# EAGLE board shinobi (EAGLE 9.6.2)
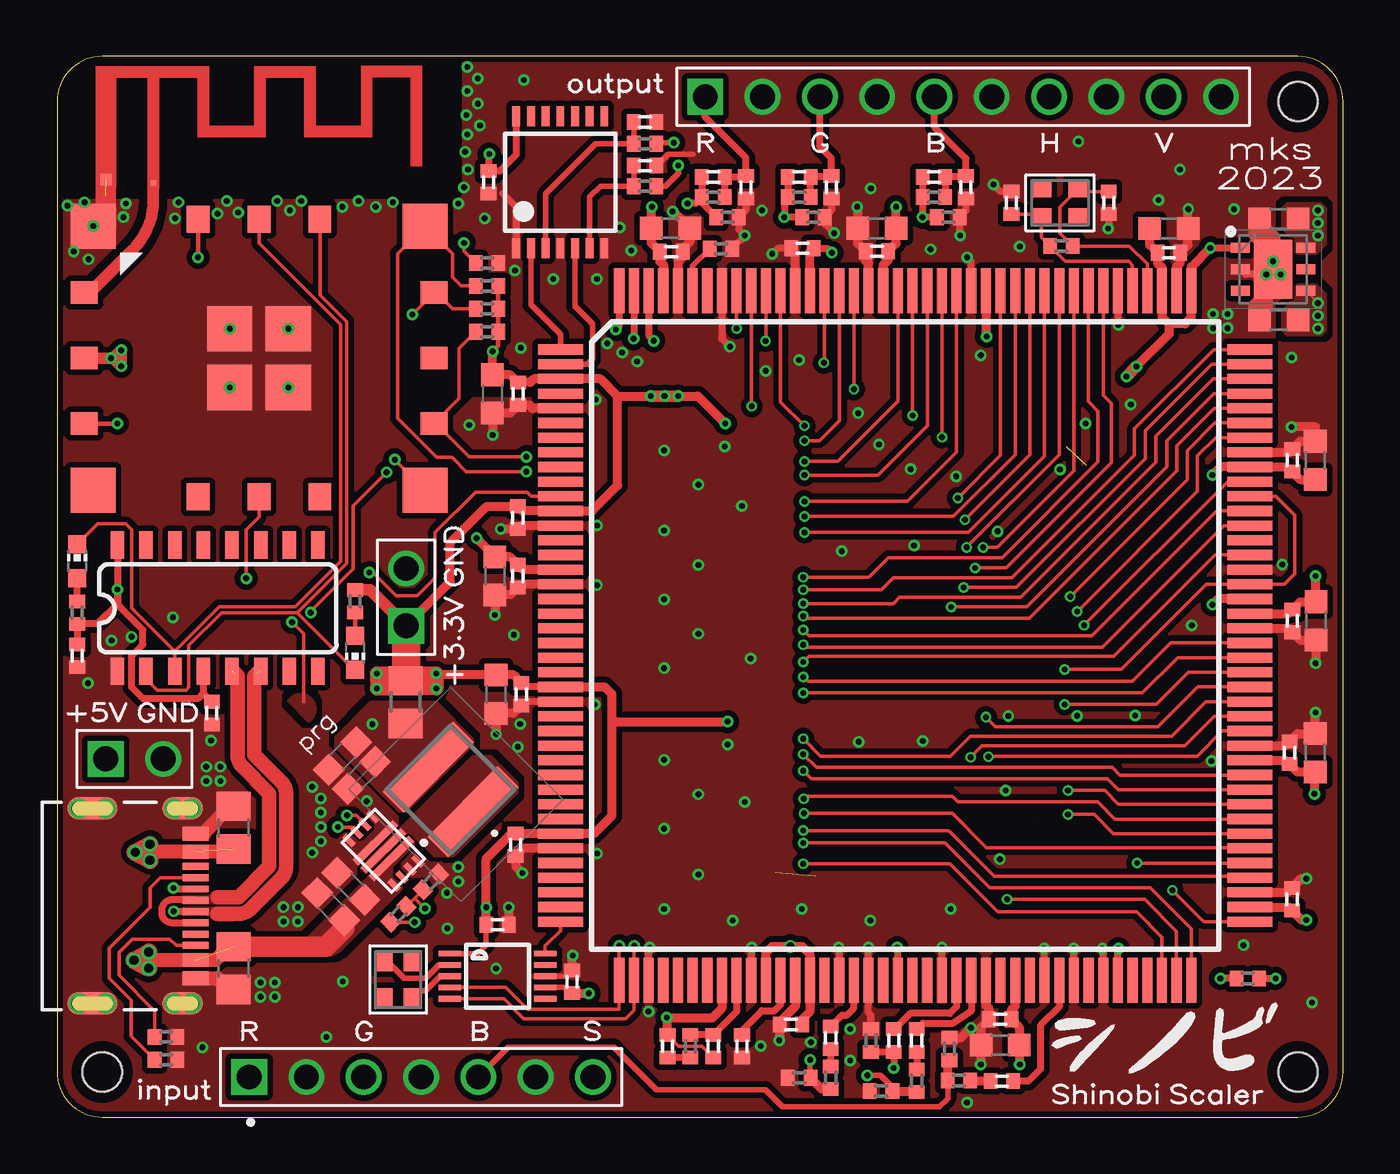
[diagram p0: board, top side]
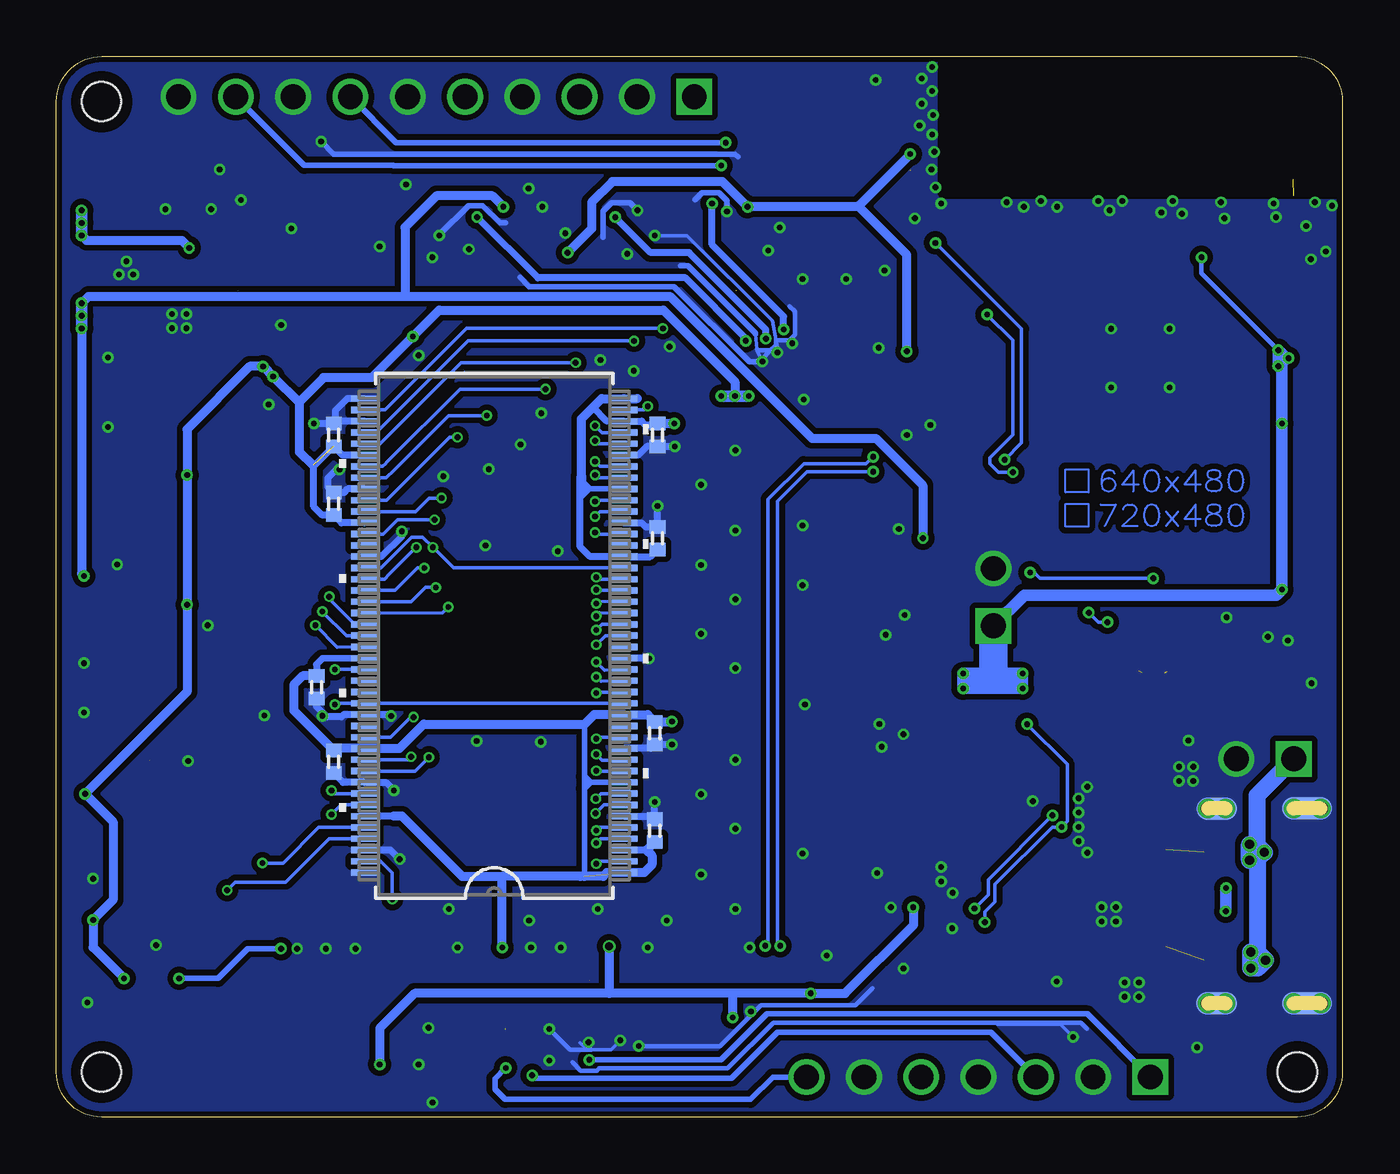
[diagram p1: board, bottom side, seen from below]

Size 57 x 47 mm. Coordinates in mm from the lower left corner, seen from the top.
Outline: 0,45 0,2 arc90 2,0 55,0 arc90 57,2 57,45 arc90 55,47 2,47 arc90 0,45
Copper layers (1*16): Top 0.035mm / dielectric 0.9mm / Bottom 0.035mm
Design rules "default *": minimum track width 3.5mil, minimum drill 10mil, track to track 3.5mil, track to pad 3.5mil, pad to pad 3.5mil, via to via 3.5mil, smd to smd 3.5mil, copper to edge 6mil, drill to drill 6mil, minimum pad ring 4mil, minimum via ring 4mil, stop-mask expansion 0mil, vias tented up to drill 50mil, thermal gap 10mil
Net classes: 1 power: width 0.305 mm
Holes 1.75 mm at 2,2 55,2 55,45
tRestrict: area 0,40.9 to 17.7,47; area 0.9,0.9 to 3.1,3.1; area 53.9,0.9 to 56.1,3.1; area 53.9,43.9 to 56.1,46.1; 4 lines
bRestrict: area 0.9,0.9 to 3.1,3.1; area 53.9,0.9 to 56.1,3.1; area 53.9,43.9 to 56.1,46.1; area 0,40.9 to 17.7,47

## Footprints (pad centres in the part's own frame; a part is rotated, then mirrored left to right if it is on the bottom)
ANTENNA = smd 0.5 x 0.5: P$1 -7.017,-1.082 | smd 0.25 x 0.25: P$2 -4.917,-1.232
C0402 = smd 0.6 x 0.7: 1 -0.5,0; 2 0.5,0
C0603 = smd 1 x 1: 1 -0.85,0; 2 0.85,0
C0805 = smd 1.3 x 1.5: 1 -0.95,0; 2 0.95,0
R0402 = smd 0.6 x 0.7: 1 -0.5,0; 2 0.5,0
2171790001_MOL = smd 0.991 x 1.803 bottom: 1 -4.316,2.728; 2 4.32,2.733 | smd 0.991 x 2.21 bottom: 3 4.316,-1.272; 4 -4.32,-1.272 | smd 0.991 x 2.21: 13 -4.32,-1.272; 14 4.32,-1.272 | smd 0.991 x 1.803: 15 -4.32,2.728; 16 4.32,2.728 | smd 0.61 x 1.143: A1/B12 -3.2,3.303; A4/B9 -2.4,3.303; B1/A12 3.2,3.303; B4/A9 2.4,3.303 | smd 0.305 x 1.143: A5 -1.25,3.303; A6 -0.25,3.303; A7 0.25,3.303; A8 1.25,3.303; B5 1.75,3.303; B6 0.75,3.303; B7 -0.75,3.303; B8 -1.75,3.303 | drill 0.61 pad 0.61: S_1_H1 -4.318,-0.686; S_1_H2 -4.318,-1.88; S_2_H1 4.318,-0.686; S_2_H2 4.318,-1.88; S_3_H1 -4.318,3.124; S_3_H2 -4.318,2.337; S_4_H1 4.318,3.124; S_4_H2 4.318,2.337
61300711121 = drill 1.1 square: 1 -7.62,0 | drill 1.1: 2 -5.08,0; 3 -2.54,0; 4 0,0; 5 2.54,0; 6 5.08,0; 7 7.62,0
61301011121 = drill 1.1 square: 1 -11.43,0 | drill 1.1: 2 -8.89,0; 3 -6.35,0; 4 -3.81,0; 5 -1.27,0; 6 1.27,0; 7 3.81,0; 8 6.35,0; 9 8.89,0; 10 11.43,0
61300211121 = drill 1.1 square: 1 -1.27,0 | drill 1.1: 2 1.27,0
VLS4012 = smd 1.3 x 4.4: 1 -1.4,0; 2 1.4,0
CHIP-LED0603 = smd 0.8 x 0.8: A 0,-0.75; C 0,0.75
R0805 = smd 1.3 x 1.5: 1 -0.95,0; 2 0.95,0
PQFP160 = smd 2 x 0.45: 1 -15.275,12.675; 2 -15.275,12.025; 3 -15.275,11.375; 4 -15.275,10.725; 5 -15.275,10.075; 6 -15.275,9.425; 7 -15.275,8.775; 8 -15.275,8.125; 9 -15.275,7.475; 10 -15.275,6.825; 11 -15.275,6.175; 12 -15.275,5.525; 13 -15.275,4.875; 14 -15.275,4.225; 15 -15.275,3.575; 16 -15.275,2.925; 17 -15.275,2.275; 18 -15.275,1.625; 19 -15.275,0.975; 20 -15.275,0.325; 21 -15.275,-0.325; 22 -15.275,-0.975; 23 -15.275,-1.625; 24 -15.275,-2.275; 25 -15.275,-2.925; 26 -15.275,-3.575; 27 -15.275,-4.225; 28 -15.275,-4.875; 29 -15.275,-5.525; 30 -15.275,-6.175; 31 -15.275,-6.825; 32 -15.275,-7.475; 33 -15.275,-8.125; 34 -15.275,-8.775; 35 -15.275,-9.425; 36 -15.275,-10.075; 37 -15.275,-10.725; 38 -15.275,-11.375; 39 -15.275,-12.025; 40 -15.275,-12.675; 81 15.275,-12.675; 82 15.275,-12.025; 83 15.275,-11.375; 84 15.275,-10.725; 85 15.275,-10.075; 86 15.275,-9.425; 87 15.275,-8.775; 88 15.275,-8.125; 89 15.275,-7.475; 90 15.275,-6.825; 91 15.275,-6.175; 92 15.275,-5.525; 93 15.275,-4.875; 94 15.275,-4.225; 95 15.275,-3.575; 96 15.275,-2.925; 97 15.275,-2.275; 98 15.275,-1.625; 99 15.275,-0.975; 100 15.275,-0.325; 101 15.275,0.325; 102 15.275,0.975; 103 15.275,1.625; 104 15.275,2.275; 105 15.275,2.925; 106 15.275,3.575; 107 15.275,4.225; 108 15.275,4.875; 109 15.275,5.525; 110 15.275,6.175; 111 15.275,6.825; 112 15.275,7.475; 113 15.275,8.125; 114 15.275,8.775; 115 15.275,9.425; 116 15.275,10.075; 117 15.275,10.725; 118 15.275,11.375; 119 15.275,12.025; 120 15.275,12.675 | smd 0.45 x 2: 41 -12.675,-15.275; 42 -12.025,-15.275; 43 -11.375,-15.275; 44 -10.725,-15.275; 45 -10.075,-15.275; 46 -9.425,-15.275; 47 -8.775,-15.275; 48 -8.125,-15.275; 49 -7.475,-15.275; 50 -6.825,-15.275; 51 -6.175,-15.275; 52 -5.525,-15.275; 53 -4.875,-15.275; 54 -4.225,-15.275; 55 -3.575,-15.275; 56 -2.925,-15.275; 57 -2.275,-15.275; 58 -1.625,-15.275; 59 -0.975,-15.275; 60 -0.325,-15.275; 61 0.325,-15.275; 62 0.975,-15.275; 63 1.625,-15.275; 64 2.275,-15.275; 65 2.925,-15.275; 66 3.575,-15.275; 67 4.225,-15.275; 68 4.875,-15.275; 69 5.525,-15.275; 70 6.175,-15.275; 71 6.825,-15.275; 72 7.475,-15.275; 73 8.125,-15.275; 74 8.775,-15.275; 75 9.425,-15.275; 76 10.075,-15.275; 77 10.725,-15.275; 78 11.375,-15.275; 79 12.025,-15.275; 80 12.675,-15.275; 121 12.675,15.275; 122 12.025,15.275; 123 11.375,15.275; 124 10.725,15.275; 125 10.075,15.275; 126 9.425,15.275; 127 8.775,15.275; 128 8.125,15.275; 129 7.475,15.275; 130 6.825,15.275; 131 6.175,15.275; 132 5.525,15.275; 133 4.875,15.275; 134 4.225,15.275; 135 3.575,15.275; 136 2.925,15.275; 137 2.275,15.275; 138 1.625,15.275; 139 0.975,15.275; 140 0.325,15.275; 141 -0.325,15.275; 142 -0.975,15.275; 143 -1.625,15.275; 144 -2.275,15.275; 145 -2.925,15.275; 146 -3.575,15.275; 147 -4.225,15.275; 148 -4.875,15.275; 149 -5.525,15.275; 150 -6.175,15.275; 151 -6.825,15.275; 152 -7.475,15.275; 153 -8.125,15.275; 154 -8.775,15.275; 155 -9.425,15.275; 156 -10.075,15.275; 157 -10.725,15.275; 158 -11.375,15.275; 159 -12.025,15.275; 160 -12.675,15.275
WIN_TSOP-86_WIN = smd 1.206 x 0.279: 1 -5.75,10.5; 2 -5.75,10; 3 -5.75,9.5; 4 -5.75,9; 5 -5.75,8.5; 6 -5.75,8; 7 -5.75,7.5; 8 -5.75,7; 9 -5.75,6.5; 10 -5.75,6; 11 -5.75,5.5; 12 -5.75,5; 13 -5.75,4.5; 14 -5.75,4; 15 -5.75,3.5; 16 -5.75,3; 17 -5.75,2.5; 18 -5.75,2; 19 -5.75,1.5; 20 -5.75,1; 21 -5.75,0.5; 22 -5.75,0; 23 -5.75,-0.5; 24 -5.75,-1; 25 -5.75,-1.5; 26 -5.75,-2; 27 -5.75,-2.5; 28 -5.75,-3; 29 -5.75,-3.5; 30 -5.75,-4; 31 -5.75,-4.5; 32 -5.75,-5; 33 -5.75,-5.5; 34 -5.75,-6; 35 -5.75,-6.5; 36 -5.75,-7; 37 -5.75,-7.5; 38 -5.75,-8; 39 -5.75,-8.5; 40 -5.75,-9; 41 -5.75,-9.5; 42 -5.75,-10; 43 -5.75,-10.5; 44 5.75,-10.5; 45 5.75,-10; 46 5.75,-9.5; 47 5.75,-9; 48 5.75,-8.5; 49 5.75,-8; 50 5.75,-7.5; 51 5.75,-7; 52 5.75,-6.5; 53 5.75,-6; 54 5.75,-5.5; 55 5.75,-5; 56 5.75,-4.5; 57 5.75,-4; 58 5.75,-3.5; 59 5.75,-3; 60 5.75,-2.5; 61 5.75,-2; 62 5.75,-1.5; 63 5.75,-1; 64 5.75,-0.5; 65 5.75,0; 66 5.75,0.5; 67 5.75,1; 68 5.75,1.5; 69 5.75,2; 70 5.75,2.5; 71 5.75,3; 72 5.75,3.5; 73 5.75,4; 74 5.75,4.5; 75 5.75,5; 76 5.75,5.5; 77 5.75,6; 78 5.75,6.5; 79 5.75,7; 80 5.75,7.5; 81 5.75,8; 82 5.75,8.5; 83 5.75,9; 84 5.75,9.5; 85 5.75,10; 86 5.75,10.5
ESP-06 = smd 2 x 2: P$1 -7.352,-5.866; P$5 -7.352,5.834; P$9 7.348,5.834; P$13 7.348,-5.866; P$17 -1.302,-1.316; P$18 1.298,-1.316; P$19 1.298,1.284; P$20 -1.302,1.284 | smd 1.2 x 1: P$2 -7.752,-2.916; P$3 -7.752,-0.016; P$4 -7.752,2.884; P$10 7.748,2.884; P$11 7.748,-0.016; P$12 7.748,-2.916 | smd 1 x 1.2: P$6 -2.702,6.134; P$7 -0.002,6.134; P$8 2.698,6.134; P$14 2.698,-6.166; P$15 -0.002,-6.166; P$16 -2.702,-6.166
TSSOP14 = smd 0.35 x 0.9: 1 -1.95,-2.925; 2 -1.3,-2.925; 3 -0.65,-2.925; 4 0,-2.925; 5 0.65,-2.925; 6 1.3,-2.925; 7 1.95,-2.925; 8 1.95,2.925; 9 1.3,2.925; 10 0.65,2.925; 11 0,2.925; 12 -0.65,2.925; 13 -1.3,2.925; 14 -1.95,2.925
MSOP10 = smd 0.25 x 1: 1 -1,-2.113; 2 -0.5,-2.113; 3 0,-2.113; 4 0.5,-2.113; 5 1,-2.113; 6 1,2.113; 7 0.5,2.113; 8 0,2.113; 9 -0.5,2.113; 10 -1,2.113
SO016 = smd 0.6 x 1.2: 1 -4.445,-2.8; 2 -3.175,-2.8; 3 -1.905,-2.8; 4 -0.635,-2.8; 5 0.635,-2.8; 6 1.905,-2.8; 7 3.175,-2.8; 8 4.445,-2.8; 9 4.445,2.8; 10 3.175,2.8; 11 1.905,2.8; 12 0.635,2.8; 13 -0.635,2.8; 14 -1.905,2.8; 15 -3.175,2.8; 16 -4.445,2.8
RGX0011A = smd 2.5 x 0.35: 1 0,0.5; 2 0,0; 3 0,-0.5 | smd 0.25 x 0.6: 4 -0.75,-1.4; 5 -0.25,-1.4; 6 0.25,-1.4; 7 0.75,-1.4; 8 0.75,1.4; 9 0.25,1.4; 10 -0.25,1.4; 11 -0.75,1.4
SON95P300X300X95-7N = smd 0.85 x 0.45: 1 -1.45,0.95; 2 -1.45,0; 3 -1.45,-0.95; 4 1.45,-0.95; 5 1.45,0; 6 1.45,0.95 | smd 1.7 x 2.6: 7 0,0
CRYSTAL_2.5X2 = smd 0.9 x 0.75: 1 -0.825,-0.625; 2 0.825,-0.625; 3 0.825,0.625; 4 -0.825,0.625

## Placement (x,y rotation side)
ANT1  WIFI_ANT_ESP8266LARGE_ANT  [ANTENNA]  9.19,42.63 0 top
C1  0.1uF  [C0402]  22.82,5.99 90 top
C2  0.1uF  [C0402]  19.52,8.53 0 top
C3  47nF  [C0402]  34.29,3.52 90 top
C4  47nF  [C0402]  38.1,3.4 90 top
C5  47nF  [C0402]  41.88,1.6 0 top
C6  1nF  [C0402]  37.08,3.4 270 top
C7  47nF  [C0402]  27.05,3.14 90 top
C8  47nF  [C0402]  29.08,3.14 270 top
C9  47nF  [C0402]  30.35,3.14 90 top
C10  15pF  [C0402]  42.29,40.51 270 top
C11  15pF  [C0402]  46.61,40.51 90 top
C12  0.1uF  [C0402]  0.89,20.45 270 top
C13  10nF  [C0402]  6.86,17.91 270 top
C14  0.1uF  [C0402]  20.42,23.98 270 top
C15  0.1uF  [C0402]  36.34,38.37 180 top
C16  0.1uF  [C0402]  54.75,21.99 270 top
C17  10uF  [C0603]  19.41,23.98 270 top
C18  10uF  [C0603]  36.34,39.39 180 top
C19  10uF  [C0603]  55.79,21.99 270 top
C20  0.1uF  [C0402]  20.32,12.07 270 top
C21  0.1uF  [C0402]  32.53,4.11 180 top
C22  0.1uF  [C0402]  41.8,4.33 180 top
C23  0.1uF  [C0402]  54.62,16.14 90 top
C24  0.1uF  [C0402]  54.75,29.1 90 top
C25  0.1uF  [C0402]  49.28,38.3 0 top
C26  0.1uF  [C0402]  20.57,18.75 270 top
C27  0.1uF  [C0402]  20.42,26.57 270 top
C28  0.1uF  [C0402]  20.44,32.05 270 top
C29  0.1uF  [C0402]  27.22,38.35 0 top
C30  0.1uF  [C0402]  33.03,38.5 180 top
C31  10uF  [C0603]  55.77,16.14 90 top
C32  10uF  [C0603]  41.8,3.19 180 top
C33  10uF  [C0603]  12.12,9.33 135 top
C34  10uF  [C0603]  13.02,10.23 135 top
C35  10uF  [C0603]  12.64,16 225 top
C36  10uF  [C0603]  13.48,15.15 225 top
C37  10uF  [C0603]  19.46,18.75 270 top
C38  10uF  [C0603]  19.29,32.05 270 top
C39  10uF  [C0603]  27.19,39.39 0 top
C40  10uF  [C0603]  49.28,39.37 0 top
C41  10uF  [C0603]  55.77,29.1 90 top
C42  0.1uF  [C0402]  54.74,9.65 90 top
C43  0.1uF  [C0402]  30.35,30.23 270 bottom
C44  0.1uF  [C0402]  30.35,25.65 90 bottom
C45  0.1uF  [C0402]  30.48,17.02 270 bottom
C46  0.1uF  [C0402]  30.48,12.7 90 bottom
C47  0.1uF  [C0402]  44.7,15.75 270 bottom
C48  0.1uF  [C0402]  45.47,19.05 270 bottom
C49  0.1uF  [C0402]  44.7,27.18 90 bottom
C50  0.1uF  [C0402]  44.7,30.23 90 bottom
C51  0.1uF  [C0402]  19.13,41.43 270 top
C52  22uF  [C0805]  7.82,12.83 90 top
C53  22uF  [C0805]  7.82,6.6 270 top
C54  10uF  [C0603]  54.15,35.33 180 top
C55  10uF  [C0603]  54.15,39.8 180 top
C56  15pF  [C0402]  29.08,41.66 0 top
C57  15pF  [C0402]  32.89,41.66 0 top
C58  15pF  [C0402]  38.86,41.66 0 top
C59  47pF  [C0402]  30.53,41.2 270 top
C60  47pF  [C0402]  34.32,41.2 270 top
C61  47pF  [C0402]  40.28,41.2 270 top
C62  130pF  [C0402]  26.06,42.16 0 top
C63  130pF  [C0402]  26.06,44.09 0 top
FB1  220Ω  [R0402]  29.08,40.77 0 top
FB2  220Ω  [R0402]  32.89,40.77 0 top
FB3  220Ω  [R0402]  38.86,40.77 0 top
J1  2171790001  [2171790001_MOL]  2.84,9.36 270 top
J2  61300711121  [61300711121]  16.13,1.78 0 top
J3  61301011121  [61301011121]  40.16,45.21 0 top
J4  61300211121  [61300211121]  3.43,15.88 0 top
J5  61300211121  [61300211121]  15.47,23.04 90 top
L1  VLS4012HBX-1R0M-N  [VLS4012]  17.44,14.52 135 top
LED1  yellow  [CHIP-LED0603]  13.21,20.57 180 top
LED2  green  [CHIP-LED0603]  0.89,24.64 0 top
R1  4.7k  [R0402]  52.78,6.15 180 top
R2  150  [R0402]  29.43,38.48 0 top
R3  200  [R0402]  34.29,1.75 90 top
R4  75  [R0402]  32.89,1.75 0 top
R5  200  [R0402]  38.1,1.62 90 top
R6  75  [R0402]  36.53,1.16 0 top
R7  200  [R0402]  39.98,1.63 0 top
R8  75  [R0402]  39.55,3.02 270 top
R9  75  [R0402]  36.07,3.4 270 top
R10  3k  [R0402]  28.07,3.14 90 top
R11  1M  [R0402]  44.52,38.6 0 top
R12  5.1k  [R0402]  4.83,2.54 0 top
R13  5.1k  [R0402]  4.83,3.56 0 top
R14  150k  [R0402]  16.57,10.43 225 top
R15  560k  [R0402]  15.13,8.99 225 top
R16  75  [R0402]  39.5,39.88 0 top
R17  75  [R0402]  33.53,39.88 0 top
R18  75  [R0402]  29.72,39.88 0 top
R19  0ohm  [R0805]  15.44,18.39 90 top
R20  33  [R0402]  26.06,43.13 180 top
R21  33  [R0402]  26.06,41.25 180 top
R22  4.7k  [R0402]  19.05,34.8 180 top
R23  4.7k  [R0402]  19.05,36.83 180 top
R24  1k  [R0402]  13.21,22.86 270 top
R25  1k  [R0402]  0.89,22.35 90 top
R26  4.7k  [R0402]  19.05,35.81 180 top
R28  4.7k  [R0402]  19.05,37.85 0 top
U1  TV5725  [PQFP160]  37.59,21.34 0 top
U2  W9864G2JH-6  [WIN_TSOP-86_WIN]  37.59,21.34 180 bottom
U3  ESP-06  [ESP-06]  8.96,33.65 0 top
U4  74ABT125PW  [TSSOP14]  22.3,41.43 0 top
U5  Si5351A-B-GT  [MSOP10]  19.52,6.25 270 top
U6  CH340C  [SO016]  7.12,22.55 0 top
U7  TPS621351  [RGX0011A]  14.46,11.8 225 top
U8  NCV8187AMN180TAG  [SON95P300X300X95-7N]  53.9,37.57 0 top
Y1  27MHZ 10pF  [CRYSTAL_2.5X2]  44.45,40.51 0 top
Y2  25.0MHz 10pF  [CRYSTAL_2.5X2]  15.11,6.1 90 top

## Library data of the parts
ANT1 U1 U3 = personal
C1-C63 FB1-FB3 R1-R26 R28 = resistor
J1 = personal; COPYRIGHT: Copyright (C) 2022 Ultra Librarian. All rights reserved.; MANUFACTURER_PART_NUMBER: 2171790001; MFR_NAME: Molex Connector Corporation
J2 = Headers; CREATED_BY: PCBLayout.com; DIGI_KEY_PART_NUMBER: 732-5320-ND; MANUFACTURER: Wurth Electronics Inc.; MPN: 61300711121
J3 = Headers; CREATED_BY: PCBLayout.com; DIGIKEY_PART_NUMBER: 732-2670-ND; MANUFACTURER: Wurth Electronics Inc.; MPN: 61301011121
J4 J5 = Headers; CREATED_BY: PCBLayout.com; DIGI_KEY_PART_NUMBER: 732-5315-ND; MANUFACTURER: Wurth Electronics Inc.; MPN: 61300211121
L1 = SamacSys_Parts; DESCRIPTION: SMD / SMT Inductors (Coils), L=1?H, L x W x T :; HEIGHT: mm; MANUFACTURER_NAME: TDK; MANUFACTURER_PART_NUMBER: VLS4012HBX-1R0M-N; MOUSER_PART_NUMBER: 810-VLS4012HBX1R0M-N; MOUSER_PRICE-STOCK: https://www.mouser.co.uk/ProductDetail/TDK/VLS4012HBX-1R0M-N?qs=A6eO%252BMLsxmRj5Q%2FVkECdLg%3D%3D
LED1 LED2 = led
U2 = personal; COPYRIGHT: Copyright (C) 2022 Ultra Librarian. All rights reserved.; MANUFACTURER_PART_NUMBER: W9864G2JH-6; MFR_NAME: Winbond
U4 = 74xx-eu
U5 Y1 Y2 = microbuilder
U6 = SparkFun-IC-Comms; PROD_ID: IC-14038
U7 = tps621351; MANUFACTURER: Texas Instruments; MANUFACTURER_NAME: Texas Instruments; MANUFACTURER_PART_NUMBER: TPS621351RGXR; PARTNUMBER: TPS621351RGXR; REFDES: RefDes; TYPE: TYPE
U8 = SamacSys_Parts; DESCRIPTION: LDO Voltage Regulators 1.2 A LOW IQ, LOW DROPOUT; HEIGHT: 0.95mm; MANUFACTURER_NAME: onsemi; MANUFACTURER_PART_NUMBER: NCV8187AMN180TAG; MOUSER_PART_NUMBER: 863-NCV8187AMN180TAG; MOUSER_PRICE-STOCK: https://www.mouser.co.uk/ProductDetail/onsemi/NCV8187AMN180TAG?qs=%252B6g0mu59x7IXrWF3QtkYYQ%3D%3D

## Nets
1.8V: C14.1 C15.1 C16.1 C17.1 C18.1 C19.1 C54.1 U1.16 U1.102 U1.142 U8.4
+3V3: C1.1 C2.1 C7.2 C8.2 C12.1 C13.1 C20.1 C21.1 C22.1 C23.1 C24.1 C25.1 C26.1 C27.1 C28.1 C29.1 C30.1 C31.1 C32.1 C37.1 C38.1 C39.1 C40.1 C41.1 C42.1 C43.1 C44.1 C45.1 C46.1 C47.1 C48.1 C49.1 C50.1 C51.1 C55.1 J5.1 R1.1 R19.2 R22.1 R23.1 R24.1 R25.1 R26.1 U1.3 U1.12 U1.24 U1.34 U1.48 U1.51 U1.54 U1.60 U1.68 U1.82 U1.92 U1.103 U1.112 U1.121 U1.123 U1.135 U1.147 U1.157 U2.1 U2.3 U2.9 U2.15 U2.29 U2.35 U2.41 U2.43 U2.49 U2.55 U2.67 U2.75 U2.81 U3.P$2 U3.P$3 U3.P$6 U4.14 U5.1 U5.7 U6.4 U6.16 U8.1 U8.6
+5V: C33.1 C34.1 C52.1 C53.1 J1.A4/B9 J1.B4/A9 J4.1 U7.1 U7.8
ANT: ANT1.P$2 U3.P$4
B: J2.5 R7.1 R8.2
B_VGA: C58.2 C61.1 FB3.2 J3.5
BOUT: C58.1 FB3.1 R16.1 U1.158
CAS#: U1.100 U2.18
D+: J1.A6 J1.B6 U6.5
D-: J1.A7 J1.B7 U6.6
DEBUG: U1.11 U3.P$15
DQM0#: U1.98 U2.16 U2.71
DQM1#: U1.130 U2.28 U2.59
DTR: U6.13
ESP_RX: LED1.C U3.P$8 U6.2
ESP_TX: LED2.C U3.P$7 U6.3
G: J2.3 R5.1 R6.2
G_VGA: C57.2 C60.1 FB2.2 J3.3
GND: ANT1.P$1 C1.2 C2.2 C9.1 C10.1 C11.1 C12.2 C13.2 C14.2 C15.2 C16.2 C17.2 C18.2 C19.2 C20.2 C21.2 C22.2 C23.2 C24.2 C25.2 C26.2 C27.2 C28.2 C29.2 C30.2 C31.2 C32.2 C33.2 C34.2 C35.2 C36.2 C37.2 C38.2 C39.2 C40.2 C41.2 C42.2 C43.2 C44.2 C45.2 C46.2 C47.2 C48.2 C49.2 C50.2 C51.2 C52.2 C53.2 C54.2 C55.2 C59.2 C60.2 C61.2 C62.2 C63.2 J1.1 J1.2 J1.3 J1.4 J1.13 J1.14 J1.15 J1.16 J1.A1/B12 J1.B1/A12 J1.S_1_H1 J1.S_1_H2 J1.S_2_H1 J1.S_2_H2 J1.S_3_H1 J1.S_3_H2 J1.S_4_H1 J1.S_4_H2 J2.2 J2.4 J2.6 J3.2 J3.4 J3.6 J3.8 J3.10 J4.2 J5.2 R2.2 R4.1 R6.1 R8.1 R9.1 R12.2 R13.2 R14.1 R16.2 R17.2 R18.2 R28.2 U1.5 U1.13 U1.17 U1.25 U1.35 U1.43 U1.50 U1.53 U1.56 U1.58 U1.63 U1.66 U1.70 U1.72 U1.74 U1.83 U1.93 U1.101 U1.105 U1.113 U1.122 U1.126 U1.136 U1.143 U1.148 U1.153 U1.156 U2.6 U2.12 U2.20 U2.32 U2.38 U2.44 U2.46 U2.52 U2.58 U2.72 U2.78 U2.84 U2.86 U3.P$5 U3.P$17 U3.P$18 U3.P$19 U3.P$20 U4.1 U4.4 U4.7 U5.8 U6.1 U7.3 U7.4 U7.7 U7.10 U7.11 U8.2 U8.7
GOUT: C57.1 FB2.1 R17.1 U1.159
GPIO0: R26.2 U3.P$10
GPIO2: U3.P$11
GPIO15: R28.1 U3.P$13
H: J3.7 R20.1
HS: C63.1 R20.2 U4.3
HSOUT: U1.1 U4.2
MA0: U1.118 U2.25
MA1: U1.120 U2.26
MA2: U1.128 U2.27
MA3: U1.129 U2.60
MA4: U1.127 U2.61
MA5: U1.119 U2.62
MA6: U1.117 U2.63
MA7: U1.115 U2.64
MA8: U1.114 U2.65
MA9: U1.111 U2.66
MA10: U1.116 U2.24
MBA: U1.107
MCLK: U1.104 U1.110 U2.68
MCS0#: U1.108 U2.22
MCS1#: U1.109 U2.23
MD0: U1.78 U2.2
MD1: U1.80 U2.4
MD2: U1.84 U2.5
MD3: U1.86 U2.7
MD4: U1.88 U2.8
MD5: U1.90 U2.10
MD6: U1.91 U2.11
MD7: U1.96 U2.13
MD8: U1.97 U2.74
MD9: U1.94 U2.76
MD10: U1.95 U2.77
MD11: U1.89 U2.79
MD12: U1.87 U2.80
MD13: U1.85 U2.82
MD14: U1.81 U2.83
MD15: U1.79 U2.85
MD16: U1.131 U2.31
MD17: U1.133 U2.33
MD18: U1.137 U2.34
MD19: U1.139 U2.36
MD20: U1.141 U2.37
MD21: U1.145 U2.39
MD22: U1.149 U2.40
MD23: U1.151 U2.42
MD24: U1.152 U2.45
MD25: U1.150 U2.47
MD26: U1.146 U2.48
MD27: U1.144 U2.50
MD28: U1.140 U2.51
MD29: U1.138 U2.53
MD30: U1.134 U2.54
MD31: U1.132 U2.56
N$1: U5.3 Y2.1
N$2: U5.2 Y2.3
N$3: R1.2 U1.75
N$4: R2.1 U1.155
N$5: C3.1 R3.2
N$6: C10.2 R11.1 U1.125 Y1.1
N$7: C4.1 R5.2
N$8: C3.2 U1.57
N$9: C4.2 U1.65
N$10: C5.1 R7.2
N$11: C5.2 U1.71
N$12: C6.1 U1.64
N$13: C8.1 R10.2 U1.49
N$14: C7.1 R10.1
N$15: C9.2 U1.52
N$16: C11.2 R11.2 U1.124 Y1.3
N$17: L1.1 U7.2
N$18: R14.2 R15.1 U7.5
N$19: C35.1 C36.1 L1.2 R15.2 R19.1 U7.6
N$20: LED1.A R24.2
N$23: J1.A5 R12.1
N$24: J1.B5 R13.1
N$25: LED2.A R25.2
PCLK: U1.40 U5.10
R: J2.1 R3.1 R4.2
R_VGA: C56.2 C59.1 FB1.2 J3.1
RAS#: U1.106 U2.19
ROUT: C56.1 FB1.1 R18.1 U1.160
RTS: U6.14
S: C6.2 J2.7 R9.2
SCL: R23.2 U1.41 U3.P$9 U5.4
SDA: R22.2 U1.42 U3.P$12 U5.5
V: J3.9 R21.1
VS: C62.1 R21.2 U4.6
VSOUT: U1.2 U4.5
WE#: U1.99 U2.17

## Tracks (layer width: path | path; a pad name or v marks a point on that pad's centre or on a via)
1.8V  (via drill 0.25 pad 0.51)
  Top 0.089: U8.4 55.88,36.09 v55.88,36.07
  Top 0.406: U1.16 20.64,24.26 C14.1 20.07,24.83 C17.1 v18.59,25.64 v18.59,25.65 | U1.142 36.62,37.76 36.84,37.98 C15.1 37.19,38.72 C18.1 v37.19,40.33 v37.19,40.34 | U1.102 54.58,22.31 C16.1 55.1,22.84 C19.1 55.78,22.85 v55.78,23.98
  Bottom 0.406: v55.88,34.95 55.88,24.08 v55.78,23.98 | v37.19,40.34 37.67,40.82 40.16,40.82 41.55,39.42 41.55,36.37 | v18.59,25.65 18.59,27.99 20.68,30.07 23.5,30.07 29.8,36.37 41.55,36.37 | v55.88,36.07 55.58,36.37 41.55,36.37
  Bottom 0.508: v55.88,34.95 v55.88,35.51 v55.88,36.07
  pour Top (no thermals): 54.97,36.93 55.83,36.93 56.29,36.47 56.29,34.85 56.03,34.59 54.51,34.59 54.25,34.85 54.25,35.76 54.86,36.37 54.86,36.83
+3V3  (via drill 0.25 pad 0.51, 0.35)  (8 unrouted)
  Top 0.152: C8.2 28.58,3.15 27.54,3.15 C7.2
  Top 0.203: R23.1 R26.1 R22.1 19.55,34.18 v19.29,33.92 | 6.25,39.66 U3.P$6 6.25,38.11 v6.24,38.1 | U3.P$2 v2.67,30.73
  Top 0.254: U5.7 22.57,5.75 C1.1 | C2.1 19.02,7.62 18.65,7.25 U5.1
  Top 0.305: U1.24 20.76,19.06 C26.1 | U6.16 v2.67,23.38 | v2.67,23.38 2.67,22.74 1.79,21.85 R25.1 C12.1 | U4.14 20.35,42.65 19.63,41.93 C51.1 | v51.12,38.52 U8.1 | U1.60 37.27,7.49 v37.24,7.52 | R1.1 v54,6.15 | 19.15,41.95 v19.15,42.67 | C30.1 34.15,38.5 v34.34,38.3 | 6.49,18.78 C13.1 | U6.4 6.49,18.78 | 6.49,18.78 6.25,18.54 3.81,18.54 3.3,19.05 3.3,20.45 3.8,20.94 3.8,21.59 2.67,22.71 v2.67,23.38
  Top 0.406: C40.1 48.43,38.65 C25.1 48.78,37.85 48.97,37.66 U1.123 48.97,35.46 49.28,35.15 | C21.1 33.03,4.33 33.37,4.67 U1.54 33.37,7.22 33.02,7.57 v32.5,7.57 31.7,7.57 31.42,7.29 U1.51 | C41.1 55.1,28.25 C24.1 54.71,28.56 54.46,28.81 U1.112 51.57,28.81 v51.21,28.45 | U1.157 26.87,37.78 26.72,37.92 C29.1 26.34,38.73 C39.1 26.34,40.31 v26.36,40.34 | U1.92 54.46,15.81 C23.1 54.98,15.29 C31.1 55.73,15.26 v55.73,14.33 | U1.82 54.58,9.31 C42.1 55.15,8.74 v55.37,8.74 | U1.147 33.37,38.33 C30.1 | C26.1 20.22,19.59 C37.1 | C37.1 19.41,19.65 | C1.1 v23.57,5.49 | C7.2 27.05,4.39 | 27.05,4.39 v27.03,4.42 | U1.48 29.47,4.83 29.03,4.39 27.05,4.39 | U1.68 42.47,4.93 42.3,4.76 C22.1 42.65,3.98 C32.1 42.65,2.36 v42.67,2.34 | C37.1 16.88,19.59 v16.82,19.66 | 24.84,31.95 24.84,27.99 23.71,26.86 U1.12 20.63,26.86 C27.1 19.04,27.07 17.42,25.45 17.42,23.72 J5.1 | 24.84,31.95 24.08,32.71 U1.3 21.13,32.71 20.98,32.56 20.55,32.56 20.5,32.61 C28.1 20.09,32.9 C38.1 v19.29,33.92 v19.3,33.93 | U1.24 24.27,19.06 24.59,18.75 24.59,17.37 | 24.59,17.37 24.59,13.36 23.79,12.56 U1.34 20.34,12.56 C20.1 20.14,12.57 19.02,11.45 v19.02,9.3 C2.1 | U1.135 41.17,34.63 v41.2,34.59 | 24.84,31.95 v26.31,31.95 | v27.53,31.95 28.4,31.95 v29.62,30.73 | 24.59,17.37 24.74,17.53 v29.72,17.53 | v51.12,38.52 50.28,37.69 50.28,37.63 50.27,37.61 U1.121 50.27,35.43 49.99,35.15 49.28,35.15 | 49.28,35.15 49.28,34.7 v47.84,33.26 | U1.103 51.46,22.96 v51.21,22.71
  Top 0.508: U3.P$3 v2.38,33.63 v2.39,33.63 2.49,33.63 | 2.49,33.63 v2.85,33.98 v2.85,33.27 2.49,33.63 | v26.31,31.95 v26.92,31.95 v27.53,31.95 | v47.84,33.26 v47.4,32.82 | R24.1 13.88,23.36 J5.1
  Top 0.61: 14.17,19.41 v14.17,19.66 15.12,19.66 R19.2 | 14.17,19.41 v14.17,19 15.1,19 | 15.1,19 R19.2 | R19.2 15.76,19.66 v16.82,19.66 | v16.82,19.66 v16.82,19 15.1,19 | R19.2 16.5,19.34 v16.82,19.66 | R19.2 14.24,19.34 14.17,19.41
  Top 1.27: J5.1 15.47,19.36 R19.2
  Bottom 0.203: v6.24,38.1 6.24,37.38 v2.85,33.98
  Bottom 0.254: 33.59,17.41 33.59,15.1 | U2.9 33.33,14.84 | 33.59,15.1 33.33,14.84 | 33.59,15.1 33.59,14.57 | 33.59,14.57 33.59,10.67 | 33.33,14.84 33.59,14.57 | 33.8,28.37 33.78,28.4 33.73,28.45 | U2.35 33.37,27.84 | 33.37,27.84 33.42,27.84 33.7,27.84 33.78,27.91 | 33.73,28.19 33.37,27.84
  Bottom 0.305: C48.1 45.47,20.07 45.21,20.32 U2.67 | C47.1 | C43.1 30.39,30.69 30.91,30.69 31.06,30.84 U2.41 32.61,30.84 33.22,31.45 | C44.1 30.67,24.84 U2.29 33.34,24.84 33.78,25.27 33.78,27.48 | 30.84,11.84 U2.3 | 42.04,13.34 U2.81 | U2.49 44.31,29.34 C50.1 45.59,28.84 45.59,27.05 45.22,26.68 C49.1 44.36,26.34 U2.55 | 33.78,27.48 33.42,27.84 | 33.74,10.7 33.78,10.67 | 33.78,27.48 33.78,27.91 33.78,28.4
  Bottom 0.406: v19.3,33.93 19.3,38.2 21.44,40.34 | 21.44,40.34 v26.36,40.34 27.48,41.45 32.36,41.45 33.27,40.54 33.27,39.37 v34.34,38.3 | 21.44,40.34 21.44,40.39 v19.15,42.67 | 46.23,31.65 46.23,29.47 46.21,29.47 45.63,28.89 | 46.23,31.65 46.23,31.7 45.16,32.77 43.03,32.77 v41.2,34.59 40.03,35.76 30.1,35.76 26.92,32.59 v26.92,31.95 | v51.12,38.52 v51.12,38.53 51.44,38.85 55.66,38.85 v55.88,39.06 | v29.62,30.73 C43.1 | 33.73,28.45 33.73,28.19 | 33.73,28.45 33.73,30.94 33.22,31.45 32.83,31.84 U2.43 31.26,31.84 | v29.72,17.53 29.73,17.52 C45.1 30.8,17.84 U2.15 33.17,17.84 33.59,17.41 40.72,17.41 41.79,16.34 U2.75 44.62,16.34 C47.1 46.48,18.03 46.48,19.15 46.08,19.55 C48.1 | 37.24,10.67 39.01,10.67 41.68,13.34 42.04,13.34 | 46.23,31.65 v47.4,32.82 v47.84,33.26 48.42,33.26 51.21,30.48 v51.21,28.45 v51.21,22.71 51.21,18.85 v55.73,14.33 54.48,13.08 54.48,9.63 v55.37,8.74 55.37,7.52 v54,6.15 | v37.24,7.52 37.24,10.67 | v19.02,9.3 19,9.27 19,8.53 22.05,5.49 v23.57,5.49 27,5.49 | v42.67,2.34 42.67,3.94 41.12,5.49 32.5,5.49 | C46.1 30.84,11.84 30.61,11.6 30.61,11.18 30.95,10.84 U2.1 32.6,10.84 32.77,10.67 33.59,10.67 | 33.6,10.67 33.78,10.67 37.24,10.67 | 27,5.49 32.5,5.49 | v27.03,4.42 27,4.45 27,5.49 | v32.5,7.57 32.5,5.49
  Bottom 0.508: v14.17,19 v16.82,19 16.82,19.43 | 16.82,19.43 v16.82,19.66 v14.17,19.66 v14.17,19 | v14.17,19 14.61,19.43 15.37,19.43 16.82,19.43 | J5.1 14.1,23.13 2.92,23.13 v2.67,23.38 v2.67,30.73 2.67,33.82 v2.85,33.98 | v26.31,31.95 v26.92,31.95 v27.53,31.95 | v55.88,39.06 v55.88,39.62 v55.88,40.18 | v2.85,33.98 v2.85,33.27 2.49,33.63 | v2.39,33.63 2.49,33.63 | 2.49,33.63 v2.85,33.98
  Bottom 1.27: 15.37,19.43 15.47,19.53 J5.1
  pour Top (no thermals): 54.97,38.2 55.83,38.2 56.29,38.66 56.29,40.28 56.03,40.54 54.51,40.54 54.25,40.28 54.25,39.37 54.86,38.76 54.86,38.3
+5V  (via drill 0.41 pad 0.66)  (2 unrouted)
  Top 0.508: 7.71,11.76 C52.1
  Top 0.61: C53.1 7.61,7.55 7.01,6.96 4.06,6.96 v4.06,7.32 3.71,6.96 | v4.06,6.6 3.71,6.96 | 3.71,6.96 v3.4,6.96 | 3.76,11.73 v4.12,11.38 v4.12,12.09 3.78,11.76 | 3.76,11.73 v3.45,11.73 | 7.71,11.76 3.78,11.76 | 3.78,11.76 3.76,11.73
  Top 0.762: v4.12,12.09 v3.45,11.73 v4.12,11.38 | v3.4,6.96 v4.06,7.32 v4.06,6.6 v3.4,6.96
  Top 0.914: C53.1 11.9,7.55 12.72,8.38 C33.1
  Bottom 0.762: J4.1 3.79,14.25 3.79,11.71 3.81,11.68 | 3.76,7.32 v3.4,6.96 3.76,6.6 v4.06,6.6 v4.06,7.32 3.76,7.32 | v4.12,11.38 3.81,11.38 v3.45,11.73 3.81,12.09 | 3.81,12.09 v4.12,12.09 v4.12,11.38 | v4.12,11.38 3.81,11.68 | 3.81,11.68 3.81,12.09 | 3.76,7.32 3.76,11.63 3.81,11.68
  pour Top (no thermals): 13.74,10.66 15.53,12.45 15.62,12.45 15.84,12.22 15.84,12.04 14.89,11.09 14.89,10.66 15.3,10.24 15.3,10.07 12.63,7.39 arc-45 11.92,7.1 11.66,7.1 11.1,7.66 arc-90 11.1,8.02
ANT
  Top 0.5: ANT1.P$2 4.27,40.65 arc-45 3.35,38.43 1.45,36.53 U3.P$4
B
  Top 0.254: R7.1 39.48,0.82 39.12,0.46 32.16,0.46 31.39,1.22 26.57,1.22 24.69,3.1 19.99,3.1 J2.5
  Top 0.406: R7.1 39.48,2.45 R8.2
B_VGA
  Top 0.305: FB3.2 C58.2 39.41,41.7 C61.1 40.28,42.47 38.89,43.87 J3.5
BOUT  (via drill 0.25 pad 0.51)
  Top 0.305: R16.1 v38.35,39.88 38.36,39.89 FB3.1 C58.1 | U1.158 26.22,34.63 v26.45,34.4
  Bottom 0.305: v26.45,34.4 26.45,34.52 29.11,37.19 35.66,37.19 v38.35,39.88
CAS#  (via drill 0.25 pad 0.46)
  Top 0.152: U1.100 49.36,21.01 47.65,19.3 33.27,19.3 v33.07,19.51
  Bottom 0.152: U2.18 32.87,19.3 v33.07,19.51
D+  (1 unrouted)
  Top 0.305: J1.B6 5.11,8.61 arc-45 4.76,8.75 arc-45 4.64,9.06 4.64,9.16 arc-45 4.78,9.51 arc-45 5.09,9.63 6.12,9.63 J1.A6
  Top 0.635: 9.41,12.28 | 7.12,9.74 8.04,9.74 9.41,11.11 9.41,12.28 | 9.41,12.28 9.41,14.34 8.2,15.55 arc-45 8,16.03 8,19.56 7.87,19.68
  pour Top (no thermals): 7.82,10.06 7.1,10.06 arc45 6.77,9.92 6.74,9.9 arc-45 6.58,9.83 5.61,9.83 arc90 5.51,9.73 5.51,9.53 arc90 5.61,9.43 7.82,9.43
D-  (via drill 0.25 pad 0.51)  (1 unrouted)
  Top 0.305: J1.A7 5.18,9.11 v5.17,9.12 | J1.B7 5.2,10.11 v5.16,10.15
  Top 0.635: 7.09,9.01 8.04,9.01 arc45 8.56,9.22 9.93,10.59 arc45 10.14,11.11 10.14,14.35 arc45 9.94,14.86 8.74,16.05 8.74,19.53 8.89,19.68
  Bottom 0.508: v5.16,10.15 v5.16,9.13 v5.17,9.12
  pour Top (no thermals): 7.85,8.69 7.11,8.69 arc-45 6.79,8.82 6.77,8.85 arc45 6.61,8.92 5.64,8.92 arc-90 5.51,9.04 5.51,9.19 arc-90 5.65,9.32 7.85,9.32
DEBUG  (via drill 0.25 pad 0.51)
  Top 0.152: U1.11 21,27.51 20.83,27.69 18.54,27.69 16.76,25.91 16.76,23.91 15.96,23.11 15.03,23.11 14.01,24.13 v13.84,24.13 | 8.97,27.47 U3.P$15 8.95,26.61 8.38,26.04 v8.38,23.88
  Bottom 0.152: v13.84,24.13 13.66,24.13 13.41,23.88 v8.38,23.88
DQM0#  (via drill 0.25 pad 0.46)
  Top 0.152: U1.98 50.14,19.71 48.72,18.29 v44.65,18.29
  Bottom 0.152: U2.16 U2.71 44.6,18.34 v44.65,18.29
DQM1#  (via drill 0.25 pad 0.46)
  Top 0.152: U1.130 44.42,29.36 v40.31,25.25
  Bottom 0.152: U2.28 39.4,24.34 v40.31,25.25 40.76,25.7 41.25,25.7 42.62,24.34 U2.59
ESP_RX
  Top 0.152: U3.P$8 11.65,36.43 12.84,35.24 12.84,24.54 10.65,22.35 | U6.2 3.94,19.42 4.45,18.92 5.71,18.92 5.84,19.05 5.84,20.91 7.29,22.35 10.65,22.35 | LED1.C 13.17,19.82 10.65,22.35
ESP_TX
  Top 0.152: U3.P$7 8.95,38.73 12.57,35.11 12.57,24.64 10.54,22.61 7.18,22.61 5.21,20.64 | U6.3 5.21,20.64 | LED2.C 1.79,26.29 3.05,26.29 3.3,26.04 3.3,22.55 5.21,20.64
G  (via drill 0.25 pad 0.51)
  Top 0.254: R6.2 37.02,1.33 36.5,1.85 v35.92,1.85
  Top 0.406: R5.1 37.07,1.12 R6.2
  Bottom 0.254: J2.3 15.57,3.76 25.04,3.76 27.08,1.73 35.79,1.73 v35.92,1.85
G_VGA
  Top 0.305: FB2.2 C57.2 33.44,41.7 C60.1 34.31,42.49 33.81,43 J3.3
GND  (via drill 0.25 pad 0.51)  (1 unrouted)
  Top 0.254: U5.8 22.58,6.25 C1.2 | C62.2 27.07,42.67 28.19,42.67
  Top 0.305: U1.25 20.82,18.41 20.57,18.17 | U4.1 20.35,40.33 19.75,40.93 | U8.2 52.68,37.34 v53.59,37.34 54.04,37.79 54.4,37.79 | R9.1 36.07,4.52 35.97,4.62 U1.58 v35.97,7.52 | U1.63 v39.22,7.52 | U1.56 34.67,7.5 v34.65,7.52 | U1.50 30.77,7.5 v30.79,7.52 | U1.43 26.22,7.47 v26.26,7.52 | U1.70 43.77,7.44 v43.74,7.47 | U1.72 v45.07,7.46 v45.06,7.47 | U1.74 46.37,7.43 v46.33,7.47 | U1.153 29.47,34.49 v29.82,34.14 | C30.2 31.94,38.5 v31.7,38.25 | C10.1 41.82,41.01 v41.5,41.33 | C11.1 46.61,39.4 v46.58,39.37 | U1.126 47.02,35.13 v47.04,35.1 | U1.136 40.52,37.92 v40.34,38.1 | C61.2 40.28,40.16 R16.2 40,39.1 v40.03,39.06 | C60.2 34.31,40.16 R17.2 34.03,39.58 v34.44,39.17 | C59.2 30.53,40.19 R18.2 30.22,39.33 v30.48,39.06 29.93,38.52 R2.2
  Top 0.406: U1.53 32.72,4.92 31.97,4.17 C21.2 32.03,3.43 v32,3.4 | U1.35 20.66,11.91 C20.2 20.32,11.12 v20.61,10.82 | 19.43,23.15 20.1,23.15 C14.2 20.55,23.61 U1.17 | 22.3,31.42 U1.5 21.07,31.41 20.93,31.55 C28.2 20.09,31.2 C38.2 v19.29,30.24 v19.3,30.23 | U1.13 20.56,26.21 C27.2 v19.66,26.06 | 27.72,38.47 28.04,38.8 C39.2 27.3,40.13 v27.28,40.13 | C29.2 27.72,38.13 27.53,37.94 U1.156 | U1.143 35.97,37.82 35.84,37.95 C15.2 35.49,38.72 C18.2 35.49,40.31 v35.46,40.34 | U1.122 49.62,37.68 49.78,37.84 C25.2 50.13,38.65 C40.2 50.13,40.22 v50.14,40.23 | U1.93 54.44,16.46 C23.2 54.98,17 C31.2 55.77,17.92 v55.78,17.93 | U1.83 54.55,9.96 C42.2 55.15,10.57 v55.37,10.57 | U1.101 54.58,21.66 C16.2 55.1,21.14 C19.2 55.79,20.13 v55.78,20.12 | U1.113 54.61,29.46 C24.2 55.1,29.95 C41.2 55.77,30.58 v54.71,30.58 | U1.148 32.72,38.31 C30.2 | C26.2 20.22,17.89 C37.2 v19.46,16.97 | C17.2 v19.41,22.25 | C2.2 v20.02,9.29 v20.02,9.3 | C1.2 22.82,7.13 v22.86,7.16 | v40.51,3.96 40.07,3.52 R8.1 | v40.95,2.34 C32.2 40.95,3.98 C22.2 41.3,4.83 41.17,4.96 U1.66
  Top 0.61: J1.B1/A12 7.1,6.16 7.61,5.65 C53.2 | J1.A1/B12 6.46,12.56 7.68,13.78 C52.2 | C55.2 53.36,39.75 53.36,38.32 53.76,37.92 v53.9,37.92 53.9,38.98 53.3,39.58 C55.2 | 53.35,36.2 53.35,35.38 C54.2 | v54.23,37.34 54.02,37.34 53.36,36.67 53.36,36.2 53.35,36.2 | C54.2 53.3,35.56 53.59,35.85 v53.59,37.34 | C54.2 53.11,35.52 53.11,35.96 53.35,36.2 | C55.2 53.11,39.61 53.11,39.08 54.4,37.79
  Top 0.9: 2.16,40.83 2.16,41.24
  Top 0.914: 2.16,41.24 2.18,39.41
  Bottom 0.152: v32,3.4 32.42,2.98 33.28,2.98 33.47,2.98 33.78,3.3 | v11.94,3.56 12.5,4.12 15.28,4.12 | 29.34,37.72 28.96,37.72 | v25.7,33.48 25.75,33.57 25.77,33.6 25.95,33.99 25.96,34.02 26.01,34.68 | v30.48,39.06 29.05,39.06 25.27,35.28 25.11,34.46 | 25.11,34.45 25,33.88
  Bottom 0.203: v35.15,3.91 34.23,2.98 33.28,2.98 | 34.12,2.42 33.76,2.06 33.05,2.06 32.95,2.16 27.24,2.16 25.22,4.19 11.6,4.19 11.33,3.92 | v31.19,3.15 27.58,3.15 25.78,4.95 21.59,4.95 20.83,5.71 | 25.03,34.42 24.38,34.42 v24.38,34.29 24.52,34.42 24.52,34.43 24.27,34.68 24.27,35.7 24.51,35.94 | 25.11,34.46 25.11,34.45 25.11,34.21 25.34,33.98 | 25.34,33.98 25.75,33.57 | 25.34,33.98 25.91,33.98 25.96,34.02
  Bottom 0.254: v45.27,43.24 44.7,42.67 26.92,42.67 26.8,42.55 | v27.28,40.13 27.28,40.62 27.62,40.96 28.38,40.96 28.7,40.64 | v31.24,40.18 31.57,40.51 32.38,40.51 32.77,40.13 32.77,38.99 | v40.03,39.06 40.03,39.09 38.73,40.39 38.1,40.39 37.34,39.62 37.08,39.62 | v25.7,33.48 25.71,33.47 26.29,33.47 29.63,36.8 36.04,36.8 36.45,37.21 | 26.01,34.68 26.01,34.73 29,37.72 29.34,37.72
  Bottom 0.305: C48.2 45.47,18.19 45.01,17.73 44.36,17.73 44.26,17.84 U2.72 42.22,17.84 v42.16,17.78 | U2.6 30.51,13.34 30.55,13.27 C46.2 v30.48,13.97 | v30.35,27.08 C44.2 30.88,26.15 31.06,26.34 U2.32 | v29.59,29.72 v29.6,29.73 C43.2 30.83,29.73 31.22,29.34 U2.38 | v29.72,16.51 v29.73,16.52 C45.2 30.66,16.34 U2.12 | v42.04,14.48 42.4,14.84 U2.78 44.29,14.84 C47.2 | v44.45,28.7 44.58,28.7 44.96,28.32 44.96,27.93 C49.2 44.24,27.68 44.08,27.84 U2.52 | v45.59,30.73 44.71,30.73 C50.2 44.64,30.79 | v30.73,20.32 30.75,20.34 U2.20 | U2.84 42.19,11.84 v41.78,11.43 | v41.69,25.96 41.69,25.75 42.6,24.84 U2.58 | U2.46 44.59,30.84 44.64,30.79 | U2.44 44.11,31.84 44.64,31.31 44.64,30.79
  other vias: 10.25,32.33 10.25,34.93 7.65,34.93 7.65,32.33 1.6,39.48 25.04,33.88 18.19,46.53 18.64,46.02 18.19,45.47 18.64,44.91 18.14,44.4 18.75,43.94 18.19,43.54 18.08,42.77 18.21,41.99 18.03,41.2 17.78,40.49 14.88,40.54 14.12,40.34 13.36,40.59 12.65,40.34 10.82,40.59 10.31,40.18 9.75,40.59 7.52,40.59 8.03,40.08 7.11,40.03 5.38,40.54 5.23,39.83 2.95,39.88 0.46,40.39 1.22,40.54 3.05,40.49 22,37.13 23.93,37.13 20.29,37.52 23.88,31.8 23.93,26.21 23.93,23.57 23.83,18.29 23.93,11.68 11.69,14.13 11.69,13.5 11.69,12.86 11.31,14.64 11.69,12.23 11.31,11.72 17.79,11.08 17.79,10.45 17.28,9.94 9.65,5.97 9.65,5.33 9.02,5.97 9.02,5.33 7.24,15.53 7.24,14.89 6.61,15.53 6.61,14.89 2.42,21.12 20.52,17.42 20.42,16.41 50.29,21.79 54.31,24.49 48.82,40.64 52.17,40.23 36.07,41.15 38.71,38.46 3.3,21.29 6.82,16.69 26.9,22.94 28.43,24.47 26.9,25.99 28.43,28.02 26.9,29.55 28.43,21.42 26.9,19.9 26.9,15.83 28.43,14.31 26.9,12.78 28.43,10.75 26.9,9.23 29.95,8.72 33,9.23 36.05,8.72 39.6,9.23 35.5,31.19 37.83,28.71 39.85,28.39 36.43,29.8 51.87,35.59 51.87,34.96 51.24,35.59 51.24,34.96 47.59,31.58 40.94,33.76 49.76,41.99 55.63,5.08 52.58,7.62 17.3,8.37 12.67,6.01 6.44,3.1 5.14,22.15 0.74,38.36 1.4,38.01 20.68,45.95 18.27,30.67 20.24,21.37 35.15,2.51 40.33,0.65 19.46,6.59 10.67,9.3 10.67,8.67 10.04,9.3 10.04,8.67 25.45,38.4 24.94,39.42 1.36,19.23 20.55,34.09 13.72,14 35.52,16.63 38.37,16.67 51.16,15.78 26.22,4.68 33.41,3.32 54.71,33.66 32.89,33.55 31.41,33.07 18.95,39.83 34.78,25.08 45.21,17.79 47.78,17.79 42.67,38.58 37.98,25.33
  pour Top (no thermals): 12.03,16.45 15.14,13.34 15.14,12.94 13.29,11.09 13.29,10.75 11.73,9.19 11.38,9.19 10.77,9.8 10.77,10.67 12.7,12.6 12.95,12.6 13.31,12.24 13.56,12.24 14.07,12.75 14.07,12.95 13.26,13.77 12.4,13.77 11.28,14.88 11.28,15.7
  pour Top (no thermals): 15.24,11.28 15.75,11.79 16.05,11.79 16.51,11.33 17.07,11.33 17.48,10.92 17.48,10.57 17.12,10.21 16.76,10.21 16.36,10.62 15.65,10.62 15.24,11.02
  pour Bottom (isolate 0.254, rank 5, no thermals): 0,34 0,0 5,0 57,0 57,11 57,47 50,47 0,47
  pour Top (isolate 0.254, rank 3, no thermals): 57,34 57,0 52,0 0,0 0,11 0,47 7,47 57,47
GOUT  (via drill 0.25 pad 0.51)
  Top 0.305: R17.1 v32.23,39.88 32.23,40.61 FB2.1 C57.1 | U1.159 25.57,34.51 v25.55,34.49
  Bottom 0.305: v25.55,34.49 25.55,34.9 28.96,38.3 30.66,38.3 v32.23,39.88
GPIO0  (via drill 0.25 pad 0.51)
  Top 0.152: U3.P$10 16.59,36.53 | U3.P$10 16.8,36.53 17.52,35.81 R26.2 | U3.P$10 15.75,35.58 v15.75,35.56 | v14.61,28.57 13.12,27.09 13.12,24.3 11.24,22.41 v11.24,22.35 | v10.41,21.93 10.92,21.43 10.92,18.41
  Bottom 0.152: v15.75,35.56 14.61,34.42 14.61,30.23 15.62,29.21 15.62,28.96 15.24,28.57 v14.61,28.57 | v11.24,22.35 10.82,21.93 v10.41,21.93
  pour Top (no thermals): 10.26,18.45 10.35,18.54 arc-90 11.24,18.54 arc-90 11.24,17.64 11.15,17.55
GPIO2
  Top 0.152: U3.P$11 16.82,33.63
GPIO15  (via drill 0.25 pad 0.51)
  Top 0.152: R28.1 18.03,38.36 v18.03,38.73 | v14.97,29.13 v14.97,29.12 U3.P$13
  Bottom 0.152: v14.97,29.13 14.22,29.88 14.22,34.93 v18.03,38.73
H  (via drill 0.25 pad 0.51)
  Top 0.254: R20.1 26.61,43.18 v27.33,43.18
  Bottom 0.254: v27.33,43.18 41.94,43.18 J3.7
HS
  Top 0.254: U4.3 21.65,40.9 23.88,43.13 R20.2 C63.1
HSOUT
  Top 0.254: U4.2 21,36 22.32,34.68 U1.1
MA0  (via drill 0.25 pad 0.46)
  Top 0.152: U1.118 51.24,32.71 48.7,30.18 48.7,29.01 42.73,23.04 37.34,23.04 37.06,22.76 v33.07,22.76
  Bottom 0.152: U2.25 32.97,22.86 v33.07,22.76
MA1  (via drill 0.25 pad 0.46)
  Top 0.152: v33.07,23.37 36.53,23.37 37.06,23.9 42.33,23.9 47.75,29.33 47.75,30.5 51.27,34.01 U1.120
  Bottom 0.152: U2.26 33.04,23.34 v33.07,23.37
MA2  (via drill 0.25 pad 0.46)
  Top 0.152: v33.07,23.93 35.99,23.93 36.85,24.79 41.89,24.79 46.14,29.04 46.14,31.29 45.72,31.71 U1.128
  Bottom 0.152: U2.27 32.98,23.84 v33.07,23.93
MA3  (via drill 0.25 pad 0.46)
  Top 0.152: v41.05,25.25 41.67,25.25 45.07,28.64 U1.129
  Bottom 0.152: v41.05,25.25 42.29,24 42.42,23.88 42.46,23.84 U2.60
MA4  (via drill 0.25 pad 0.46)
  Top 0.152: v40.69,24.33 42.08,24.33 46.74,28.99 46.74,31.62 46.37,31.99 U1.127
  Bottom 0.152: v40.69,24.33 41,24.33 41.99,23.34 U2.61
MA5  (via drill 0.25 pad 0.46)
  Top 0.152: U1.119 51.19,33.36 48.23,30.4 48.23,29.18 42.52,23.47 v40.18,23.47
  Bottom 0.152: v40.18,23.47 40.64,23.47 41.27,22.84 U2.62
MA6  (via drill 0.25 pad 0.46)
  Top 0.152: U1.117 51.27,32.06 49.19,29.98 49.19,28.82 42.97,22.61 v39.62,22.61
  Bottom 0.152: U2.63 39.88,22.35 v39.62,22.61
MA7  (via drill 0.25 pad 0.46)
  Top 0.152: U1.115 51.32,30.76 50.09,29.53 50.09,28.25 v44.91,23.06
  Bottom 0.152: U2.64 43.79,21.84 44.91,22.96 v44.91,23.06
MA8  (via drill 0.25 pad 0.46)
  Top 0.152: U1.114 51.35,30.11 50.55,29.31 50.55,27.74 v45.21,22.4
  Bottom 0.152: v45.21,22.4 44.15,21.34 U2.65
MA9  (via drill 0.25 pad 0.46)
  Top 0.152: U1.111 51.88,28.16 v45.52,21.79
  Bottom 0.152: U2.66 44.55,20.83 v45.52,21.79
MA10  (via drill 0.25 pad 0.46)
  Top 0.152: v33.07,22.2 33.17,22.1 43.09,22.1 49.63,28.64 49.63,29.75 51.29,31.41 U1.116
  Bottom 0.152: U2.24 32.92,22.35 v33.07,22.2
MCLK  (via drill 0.25 pad 0.46)
  Top 0.152: U1.110 54.02,27.51 54.86,26.67 54.86,24.08 54.4,23.61 U1.104 50.94,23.61 47.17,19.84 v44.65,19.84
  Bottom 0.152: U2.68 v44.65,19.84
MCS0#  (via drill 0.25 pad 0.46)
  Top 0.152: U1.108 51.71,26.21 46.33,20.83 33.17,20.83 v33.07,20.93
  Bottom 0.152: U2.22 32.66,21.34 v33.07,20.93
MCS1#  (via drill 0.25 pad 0.46)
  Top 0.152: U1.109 51.4,26.86 45.87,21.34 33.33,21.34 v33.07,21.59
  Bottom 0.152: U2.23 32.82,21.84 v33.07,21.59
MD0  (via drill 0.25 pad 0.46)
  Top 0.152: U1.78 48.97,7.98 47.85,9.09 41.71,9.09 39.57,11.23 v33.07,11.23
  Bottom 0.152: v33.07,11.23 32.96,11.34 U2.2 | U2.2
MD1  (via drill 0.25 pad 0.46)
  Top 0.152: U1.80 50.27,8.36 48.46,10.16 41.35,10.16 39.36,12.15 v33.07,12.15
  Bottom 0.152: U2.4 32.89,12.34 v33.07,12.15
MD2  (via drill 0.25 pad 0.46)
  Top 0.152: U1.84 52.81,10.67 41.55,10.67 39.52,12.7 v33.07,12.7
  Bottom 0.152: U2.5 32.94,12.84 v33.07,12.7
MD3  (via drill 0.25 pad 0.46)
  Top 0.152: v33.1,13.46 39.67,13.46 41.2,11.94 52.84,11.94 U1.86
  Bottom 0.152: U2.7 32.73,13.84 v33.1,13.46
MD4  (via drill 0.25 pad 0.46)
  Top 0.152: v33.09,14.11 33.09,14.22 39.67,14.22 39.93,13.97 46.13,13.97 46.88,13.21 U1.88
  Bottom 0.152: v33.09,14.11 32.87,14.34 U2.8
MD5  (via drill 0.25 pad 0.46)
  Top 0.152: v33.07,15.35 33.43,14.99 46.56,14.99 47.03,14.51 U1.90
  Bottom 0.152: U2.10 33.06,15.34 v33.07,15.35
MD6  (via drill 0.25 pad 0.46)
  Top 0.152: v33.07,16.08 33.66,15.49 46.77,15.49 47.11,15.16 U1.91
  Bottom 0.152: U2.11 31.86,15.82 32.81,15.82 v33.07,16.08
MD7  (via drill 0.25 pad 0.46)
  Top 0.152: U1.96 50.92,18.41 49.4,16.89 40.48,16.89 39.6,16 33.83,16 v33.07,16.76
  Bottom 0.152: U2.13 33,16.84 v33.07,16.76
MD8  (via drill 0.25 pad 0.46)
  Top 0.152: U1.97 50.56,19.06 48.8,17.3 41.59,17.3 v41.17,17.72
  Bottom 0.152: v41.17,17.72 41.3,17.72 42.19,16.84 U2.74
MD9  (via drill 0.25 pad 0.46)
  Top 0.152: v41.27,15.97 41.31,16 50.53,16 51.64,17.11 U1.94
  Bottom 0.152: U2.76 41.41,15.84 v41.27,15.97
MD10  (via drill 0.25 pad 0.46)
  Top 0.152: U1.95 51.29,17.76 49.99,16.46 41,16.46 v40.49,15.95
  Bottom 0.152: U2.77 41.1,15.34 v40.49,15.95
MD11  (via drill 0.25 pad 0.46)
  Top 0.152: v44.81,14.48 46.43,14.48 47.05,13.86 U1.89
  Bottom 0.152: U2.79 44.66,14.34 v44.81,14.48
MD12  (via drill 0.25 pad 0.46)
  Top 0.152: v44.81,13.41 45.97,13.41 46.82,12.56 U1.87
  Bottom 0.152: U2.80 44.38,13.84 v44.81,13.41
MD13  (via drill 0.25 pad 0.46)
  Top 0.152: U1.85 v47.87,11.26
  Bottom 0.152: v47.87,11.26 46.96,11.26 45.38,12.84 U2.82
MD14  (via drill 0.25 pad 0.46)
  Top 0.152: U1.81 50.83,8.66 v49.43,10.06
  Bottom 0.152: v49.43,10.06 49.07,10.41 46.84,10.41 44.92,12.34 U2.83
MD15  (via drill 0.25 pad 0.46)
  Top 0.152: U1.79 49.62,8.24 48.21,9.65 v42.11,9.65
  Bottom 0.152: v42.11,9.65 42.11,10.82 42.63,11.34 U2.85
MD16  (via drill 0.25 pad 0.46)
  Top 0.152: U1.131 43.77,29.29 40.39,25.91 v33.12,25.91
  Bottom 0.152: U2.31 33.05,25.84 v33.12,25.91
MD17  (via drill 0.25 pad 0.46)
  Top 0.152: U1.133 42.47,29.36 39.73,26.62 v33.12,26.62
  Bottom 0.152: U2.33 32.91,26.84 v33.12,26.62
MD18  (via drill 0.25 pad 0.46)
  Top 0.152: U1.137 39.87,29.45 37.7,27.29 v33.13,27.29
  Bottom 0.152: U2.34 33.08,27.34 v33.13,27.29
MD19  (via drill 0.25 pad 0.46)
  Top 0.152: U1.139 38.57,30.64 36.37,28.45 v33.12,28.45
  Bottom 0.152: U2.36 33.01,28.34 v33.12,28.45
MD20  (via drill 0.25 pad 0.46)
  Top 0.152: v33.12,29.06 34.61,29.06 37.27,31.71 U1.141
  Bottom 0.152: U2.37 32.9,28.84 v33.12,29.06
MD21  (via drill 0.25 pad 0.46)
  Top 0.152: U1.145 34.67,30.86 33.78,29.97 v33.12,29.97
  Bottom 0.152: U2.39 32.99,29.84 v33.12,29.97
MD22  (via drill 0.25 pad 0.46)
  Top 0.152: U1.149 32.07,31.69 v33.12,30.63
  Bottom 0.152: U2.40 32.83,30.34 v33.12,30.63
MD23  (via drill 0.25 pad 0.46)
  Top 0.152: U1.151 30.77,31.51 v30.79,31.5
  Bottom 0.152: U2.42 30.95,31.34 v30.79,31.5
MD24  (via drill 0.25 pad 0.46)
  Top 0.152: U1.152 v30.12,34.95
  Bottom 0.152: v30.12,34.95 38.81,34.95 42.43,31.34 U2.45
MD25  (via drill 0.25 pad 0.46)
  Top 0.152: U1.150 31.42,34.41 v31.39,34.39
  Bottom 0.152: v31.39,34.39 38.76,34.39 42.61,30.54 42.67,30.48 42.82,30.34 U2.47
MD26  (via drill 0.25 pad 0.46)
  Top 0.152: U1.146 34.02,33.46 v33.98,33.43
  Bottom 0.152: v33.98,33.43 39.06,33.43 42.66,29.84 U2.48
MD27  (via drill 0.25 pad 0.46)
  Top 0.152: U1.144 v35.32,32.26
  Bottom 0.152: v35.32,32.26 39.12,32.26 42.35,29.02 42.42,28.96 42.54,28.84 U2.50
MD28  (via drill 0.25 pad 0.46)
  Top 0.152: U1.140 v37.92,31.1 v37.92,31.09
  Bottom 0.152: v37.92,31.09 39.62,31.09 42.15,28.56 42.27,28.45 42.38,28.34 U2.51
MD29  (via drill 0.25 pad 0.46)
  Top 0.152: U1.138 v39.22,30.13
  Bottom 0.152: v39.22,30.13 39.57,30.13 42.22,27.48 42.27,27.43 42.36,27.34 U2.53
MD30  (via drill 0.25 pad 0.46)
  Top 0.152: U1.134 41.82,29.32 v39.93,27.43
  Bottom 0.152: v39.93,27.43 40.49,27.43 41.08,26.84 U2.54
MD31  (via drill 0.25 pad 0.46)
  Top 0.152: v40.23,26.47 43.12,29.35 U1.132
  Bottom 0.152: v40.23,26.47 41.88,26.47 42.52,25.84 U2.56
N$1
  Top 0.254: Y2.1 16.06,5.6 16.33,5.6 16.98,6.25 U5.3
N$2
  Top 0.254: U5.2 16.93,6.75 16.34,6.16 15.37,6.16 14.61,6.92 Y2.3
N$3  (via drill 0.25 pad 0.51)
  Top 0.305: U1.75 47.02,7.44 v47.04,7.47 | R1.2 v51.56,6.15
  Bottom 0.254: v47.04,7.47 48.51,7.47 49.84,6.15 v51.56,6.15
N$4
  Top 0.254: U1.155 28.17,37.72 R2.1
N$5
  Top 0.305: R3.2 C3.1
N$6
  Top 0.152: U1.125 47.67,37.75 47.5,37.92 44.69,37.92 R11.1 43.62,38.99 Y1.1 43.5,40.01 C10.2
N$7
  Top 0.305: C4.1 R5.2
N$8
  Top 0.305: C3.2 34.79,4.52 35,4.52 35.32,4.84 U1.57
N$9
  Top 0.305: C4.2 38.37,4.17 39.71,4.17 40.52,4.71 U1.65
N$10
  Top 0.406: C5.1 40.51,1.6 R7.2
N$11
  Top 0.305: U1.71 44.42,4.89 43.59,4.06 43.59,2.13 43.05,1.6 C5.2
N$12  (1 unrouted)
  Top 0.305: U1.64 39.87,4.9 39.57,4.6 37.81,4.6 37.11,3.9
N$13
  Top 0.305: U1.49 30.12,4.68 C8.1 R10.2
N$14
  Top 0.305: R10.1 C7.1
N$15
  Top 0.305: C9.2 30.35,3.83 31.24,4.72 31.8,4.72 32.07,4.99 U1.52
N$16
  Top 0.152: 46.6,41 C11.2 45.4,41.01 Y1.3 44.45,40.31 44.45,39.16 R11.2 47.53,38.6 48.32,37.81 U1.124
N$17
  pour Top (no thermals): 20.45,14.38 17.57,11.51 16.7,11.51 15.65,12.56 15.49,12.56 13.73,10.79 13.65,10.79 13.44,11.01 13.44,11.08 18.4,16.04 19.26,16.04 20.45,14.84
N$18  (via drill 0.25 pad 0.51)
  Top 0.152: U7.5 13.24,13.37 v12.85,13.37 | R14.2 15.84,9.71 | 15.84,9.71 R15.1 | R15.1 | v16.31,9.25 15.84,9.71
  Bottom 0.152: v12.85,13.37 15.7,10.53 15.7,9.86 v16.31,9.25
N$19  (via drill 0.25 pad 0.51)
  Top 0.152: U7.6 13.06,12.85 v12.45,12.85 | R15.2 v15.85,8.64
  Bottom 0.152: v13.97,17.41 12.19,15.63 12.19,13.11 v12.45,12.85 12.85,12.85 15.39,10.31 15.39,9.55 15.85,9.09 v15.85,8.64
  pour Top (no thermals): 12.29,16.36 15.14,13.51 15.49,13.51 18.49,16.51 18.49,16.76 16.81,18.44 13.87,18.44 12.29,16.87
N$20
  Top 0.203: LED1.A R24.2
N$23
  Top 0.152: J1.A5 4.57,10.61 4.12,10.16 4.12,9.3 2.31,7.49 2.31,6.15 3.28,5.18 3.28,3.59 R12.1
N$24
  Top 0.152: J1.B5 5.28,7.61 5,7.89 3.32,7.89 2.74,7.32 2.74,6.28 4.33,4.7 R13.1
N$25
  Top 0.305: R25.2 LED2.A
N$44
  Bottom 0.081: 10.1,28.53 10.14,28.62 10.29,28.66 10.39,28.66 10.53,28.62 10.63,28.48 10.68,28.26 10.68,28.04 | 10.68,28.04 10.63,27.86 10.53,27.77 10.39,27.73 10.34,27.73 10.19,27.77 10.1,27.86 10.05,27.99 10.05,28.04 10.1,28.17 10.19,28.26 10.34,28.3 10.39,28.3 10.53,28.26 10.63,28.17 10.68,28.04
N$45
  Bottom 0.081: 9.03,28.04 9.76,28.04 9.27,28.66 9.27,27.73
N$46
  Bottom 0.081: 8.5,28.66 8.64,28.62 8.74,28.48 8.79,28.26 8.79,28.13 8.74,27.91 8.64,27.77 8.5,27.73 8.4,27.73 8.26,27.77 8.16,27.91 8.11,28.13 8.11,28.26 8.16,28.48 8.26,28.62 8.4,28.66 8.5,28.66
N$47
  Bottom 0.081: 7.82,28.35 7.29,27.73
N$48
  Bottom 0.081: 7.29,28.35 7.82,27.73
N$49
  Bottom 0.081: 6.28,28.04 7,28.04 6.52,28.66 6.52,27.73
N$50
  Bottom 0.081: 5.79,28.66 5.94,28.62 5.99,28.53 5.99,28.44 5.94,28.35 5.84,28.3 5.65,28.26 5.5,28.22 5.4,28.13 5.36,28.04 5.36,27.91 5.4,27.82 5.45,27.77 5.6,27.73 5.79,27.73 5.94,27.77 5.99,27.82 6.03,27.91 6.03,28.04 5.99,28.13 5.89,28.22 5.74,28.26 5.55,28.3 5.45,28.35 5.4,28.44 5.4,28.53 5.45,28.62 5.6,28.66 5.79,28.66
N$51
  Bottom 0.081: 4.78,28.66 4.92,28.62 5.02,28.48 5.07,28.26 5.07,28.13 5.02,27.91 4.92,27.77 4.78,27.73 4.68,27.73 4.53,27.77 4.44,27.91 4.39,28.13 4.39,28.26 4.44,28.48 4.53,28.62 4.68,28.66 4.78,28.66
N$52
  Bottom 0.081: 10.53,26.2 10.05,27.14 10.73,27.14
N$53
  Bottom 0.081: 9.71,26.91 9.71,26.96 9.66,27.05 9.61,27.09 9.52,27.14 9.32,27.14 9.23,27.09 9.18,27.05 9.13,26.96 9.13,26.87 9.18,26.78 9.27,26.65 9.76,26.2 9.08,26.2
N$54
  Bottom 0.081: 8.5,27.14 8.64,27.09 8.74,26.96 8.79,26.74 8.79,26.6 8.74,26.38 8.64,26.25 8.5,26.2 8.4,26.2 8.26,26.25 8.16,26.38 8.11,26.6 8.11,26.74 8.16,26.96 8.26,27.09 8.4,27.14 8.5,27.14
N$55
  Bottom 0.081: 7.82,26.83 7.29,26.2
N$56
  Bottom 0.081: 7.29,26.83 7.82,26.2
N$57
  Bottom 0.081: 6.28,26.51 7,26.51 6.52,27.14 6.52,26.2
N$58
  Bottom 0.081: 5.79,27.14 5.94,27.09 5.99,27 5.99,26.91 5.94,26.83 5.84,26.78 5.65,26.74 5.5,26.69 5.4,26.6 5.36,26.51 5.36,26.38 5.4,26.29 5.45,26.25 5.6,26.2 5.79,26.2 5.94,26.25 5.99,26.29 6.03,26.38 6.03,26.51 5.99,26.6 5.89,26.69 5.74,26.74 5.55,26.78 5.45,26.83 5.4,26.91 5.4,27 5.45,27.09 5.6,27.14 5.79,27.14
N$59
  Bottom 0.081: 4.78,27.14 4.92,27.09 5.02,26.96 5.07,26.74 5.07,26.6 5.02,26.38 4.92,26.25 4.78,26.2 4.68,26.2 4.53,26.25 4.44,26.38 4.39,26.6 4.39,26.74 4.44,26.96 4.53,27.09 4.68,27.14 4.78,27.14
N$60
  Bottom 0.081: 11.25,28.7 11.25,27.69 12.27,27.69 12.27,28.7 11.25,28.7
N$61
  Bottom 0.081: 11.25,27.18 11.25,26.16 12.27,26.16 12.27,27.18 11.25,27.18
PCLK
  Top 0.152: U5.10 21.64,7.59 22.32,8.27 U1.40
R  (via drill 0.25 pad 0.51)
  Top 0.254: R4.2 33.38,1.76 v33.38,2.54
  Top 0.406: R3.1 33.89,1.25 R4.2
  Bottom 0.254: J2.1 11.3,4.57 25.5,4.57 27.53,2.54 v33.38,2.54
R_VGA
  Top 0.305: FB1.2 C56.2 30.49,41.66 C59.1 30.53,42.52 28.73,44.32 J3.1
RAS#  (via drill 0.25 pad 0.46)
  Top 0.152: U1.106 51.33,24.91 46.84,20.42 33.33,20.42 v33.07,20.17
  Bottom 0.152: U2.19 32.72,19.81 v33.07,20.17
ROUT  (via drill 0.25 pad 0.51)
  Top 0.305: C56.1 FB1.1 28.56,40.74 | 28.56,40.74 28.3,40.49 v27.94,40.49 | R18.1 28.56,40.54 28.56,40.74 | U1.160 24.92,35.05 v24.77,34.9
  Bottom 0.305: v24.77,34.9 24.77,35.48 27.94,38.66 v27.94,40.49
S  (via drill 0.25 pad 0.51)
  Top 0.305: v37.08,2.18 C6.2 R9.2
  Bottom 0.254: J2.7 25.25,1.78 26.24,0.79 37.11,0.79 37.57,1.25 37.57,1.71 v37.09,2.18 v37.08,2.18
SCL  (via drill 0.25 pad 0.51)
  Top 0.152: v24.92,7.59 U1.41 24.92,4.78 20.85,4.78 19.88,5.75 U5.4 | U3.P$9 15.08,38.26 15.08,30.98 16.82,29.23 17.5,29.23 18.14,28.6 v20.8,28.6 | U3.P$9 16.3,38.72 | R23.2 17.91,36.83 17.53,37.21 17.53,38.26 U3.P$9
  Bottom 0.152: v20.8,28.6 23.72,28.6 25.04,27.28 25.04,7.72 v24.92,7.59
SDA  (via drill 0.25 pad 0.51)
  Top 0.152: U5.5 19.81,5.25 20.68,4.37 25.2,4.37 25.57,4.74 U1.42 25.57,7.58 v25.58,7.59 | v20.8,29.26 18.26,29.26 16.79,30.73 U3.P$12 17.82,31.85 17.82,34.06 R22.2
  Bottom 0.152: v25.58,7.59 25.45,7.72 25.45,27.38 23.88,28.96 21.11,28.96 v20.8,29.26
V  (via drill 0.25 pad 0.51)
  Top 0.254: v27.53,42.16 27.53,41.82 26.97,41.25 R21.1
  Bottom 0.254: J3.9 46.01,42.18 42.07,42.18 42.06,42.16 v27.53,42.16
VS
  Top 0.254: U4.6 23.6,40.77 24.08,41.25 R21.2 C62.1
VSOUT
  Top 0.254: U1.2 23.51,33.36 23.72,33.58 23.72,35.15 22.95,35.93 U4.5
WE#  (via drill 0.25 pad 0.46)
  Top 0.152: U1.99 49.67,20.36 48.11,18.8 v33.07,18.8
  Bottom 0.152: U2.17 33.03,18.84 v33.07,18.8